# Altium PCB MCU103A.PcbDoc (part 3 of 6)
Units mm, origin at the board's own origin, x right, y up, seen from the top; angles counter-clockwise.
Board outline 58.42 x 139.7 mm, 4 copper layers (Top Signal, GND, PWR, Bottom Signal), stack 1.565 mm thick; 256 components, 210 nets, 1058 pads, 772 vias.
Unrouted connection lines stored in the file: 237.
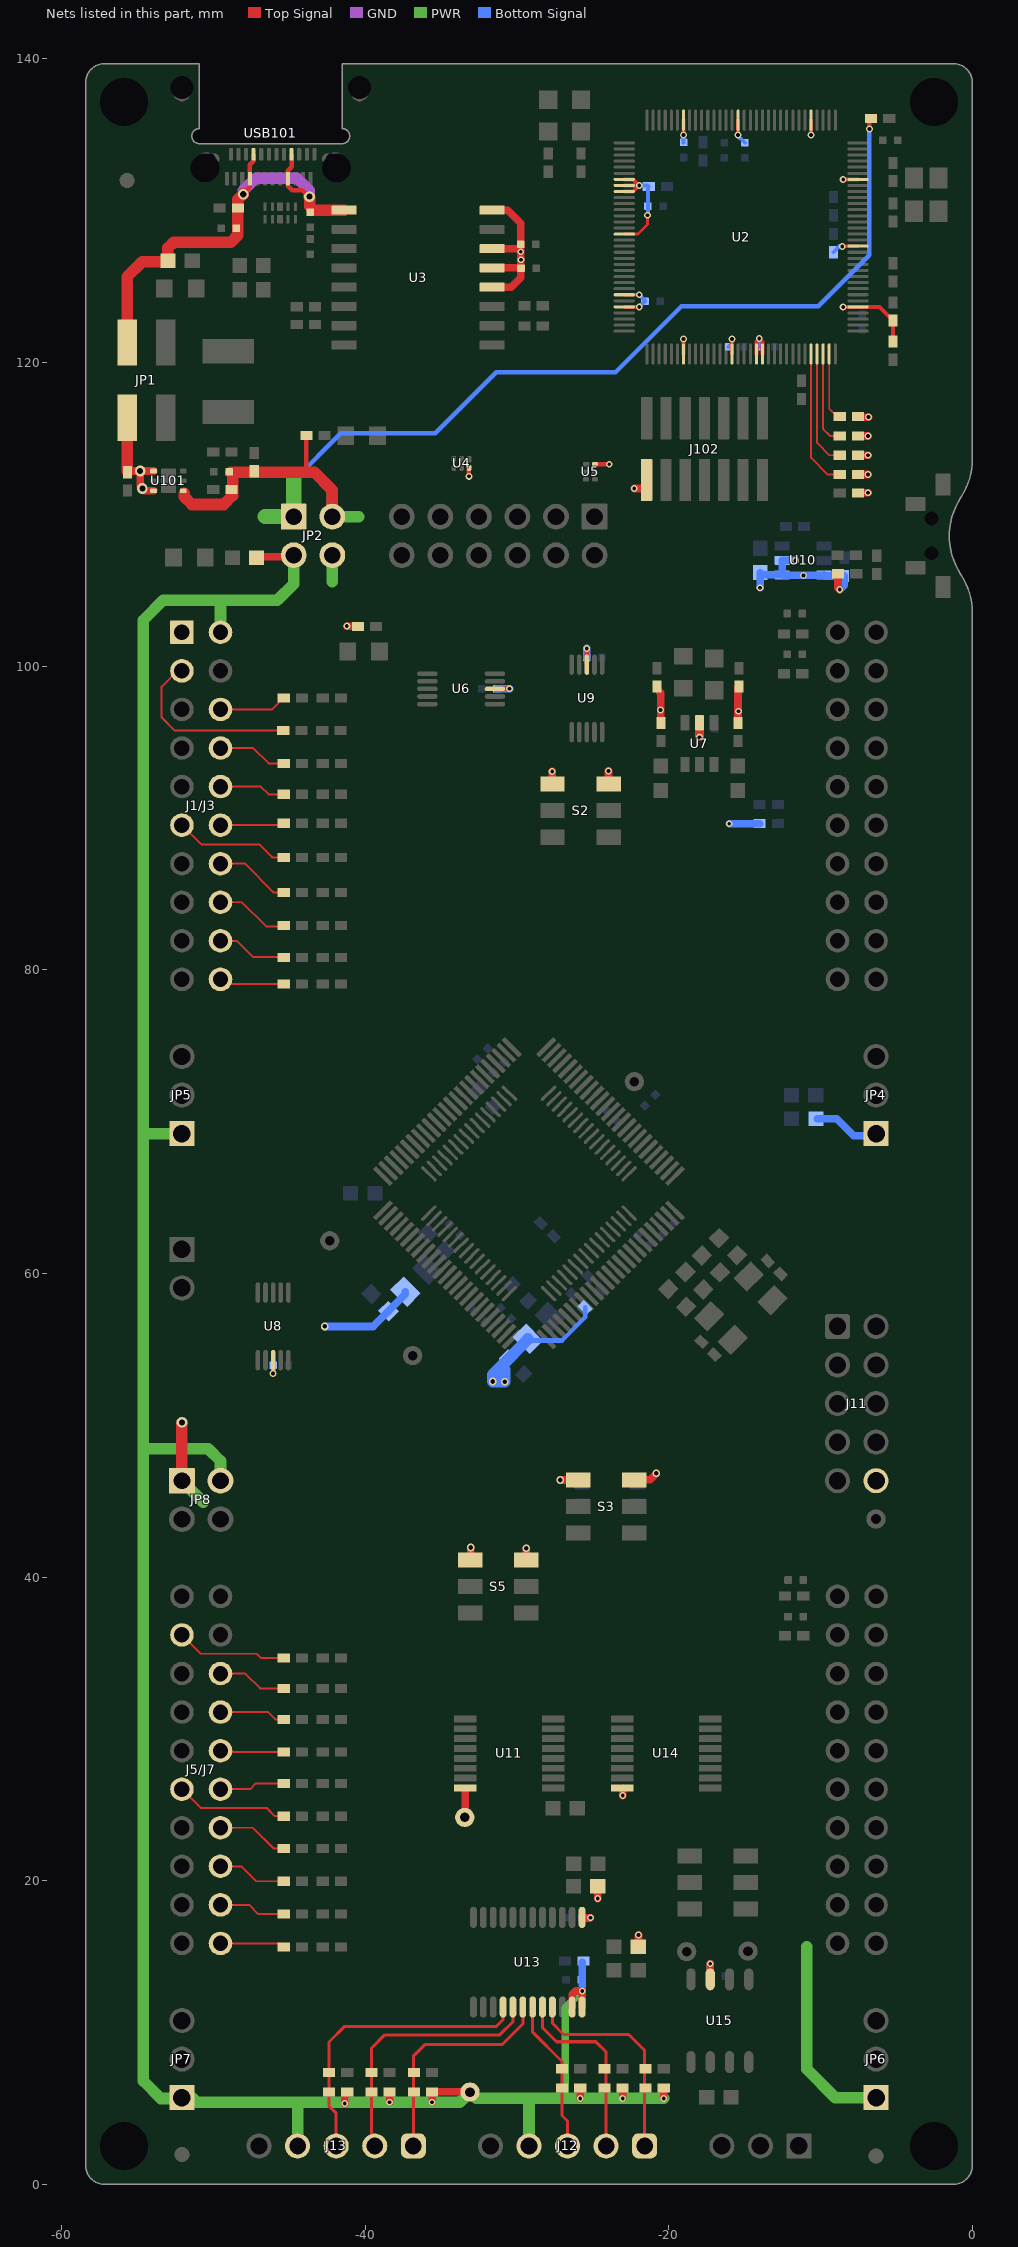
[diagram p4: the nets of this part, all layers, seen from the top]

## Part data (continued)
U7: library part CMP-0051789-2, "Dual Buffer/Driver with Open-Drain Output, DBV0006A, LARGE T&R", F @ Nom Voltage(Max)(Mhz)=150, Generic Part Number=SN74LVC2G07, ICC @ Nom Voltage(Max)(mA)=0.01, Manufacturer="Texas Instruments", Operating Temperature Range(C)="-40 to 125", Rating=Catalog, tpd @ Nom Voltage(Max)(ns)=8.6,4.4,3.7,2.9, Voltage(Nom)(V)=1.8,2.5,3.3,5, 3-State Output=No, AEC Category=Q200, AEC Qualified=N, Bits(#)=2, ComponentLink1Description="Datasheet Link", ComponentLink1URL=http://www.ti.com/lit/ds/symlink/sn74lvc2g07.pdf, ComponentLink2Description="Product Folder", ComponentLink2URL=http://www.ti.com/product/sn74lvc2g07, ComponentLink3Description="Online Datasheet", ComponentLink3URL=http://www.ti.com/product/sn74lvc2g07/datasheet, CompType=IC, DatasheetVersion=SCES308K, Green_EU RoHS=Passed, Green_EU RoHS-2=Passed, Green_Lifecycle=Active, Green_REACh=Passed, Input Type=CMOS/TTL, Logic=True, MountType=SMT, Output Drive (IOL/IOH)(Max)(mA)=32/-32, Output Type=CMOS, PackageDescription=SOT-23-6, PackageReference=DBV0006A, PartNumber=SN74LVC2G07DBVR, RoHS=Y, Schmitt Trigger=No, SizeArea_mm2=8.12, SizeAreaWB_mm2=14.82, SizeX_mm=2.8, SizeY_mm=2.9, SizeZ_mm=1.45, Sub-Family="Inverting Buffer/Driver", Technology Family=LVC, VCC(Max)(V)=5.5, VCC(Min)(V)=1.65
U10: library part CMP-0067340-2, "High-Accuracy, Fixed-Threshold OV/UV Monitor, DDC0006A (SOT-23-T-6)", Alternate Manufacturer="Texas Instruments", Alternate PartNumber=TPS3702CX33DDCT, ComponentLink1Description="Datasheet Link", ComponentLink1URL=http://www.ti.com/lit/ds/symlink/tps3702.pdf, CompType=IC, LatestRevisionDate=2017-06-09, Manufacturer="Texas Instruments", MountType=SMT, PackageDescription=SOT-23-T-6, PackageReference=DDC0006A, PartNumber=TPS3702CX33DDCR, Publisher="Texas Instruments", RoHS=Y, SizeArea_mm2=4.8675, SizeAreaWB_mm2=10.4675, SizeX_mm=1.65, SizeY_mm=2.95, SizeZ_mm=0.87, U/M=EA
U11 U14: library part CMP-0089841-1, "3 Circuit IC Switch 2:1 75Ohm 16-TSSOP", Digikey Part Number=296-3833-1-ND, Manufacturer="Texas Instruments", Max Supply Voltage=5.5V, Min Supply Voltage=2V, Mouser Part Number=595-SN74LV4053APWR, Nominal Supply Current=20uA, On State Resistance=100-225Ω, Operating Temperature Range="-40°C to +85°C", -3Db Bandwith=50MHz, AEC Qualified=No, ComponentLink1Description=Datasheet, ComponentLink1URL=https://upverter.com/datasheet/3a9d815208c4051a64f1f6fd539a8c5a24990e71.pdf, datasheet=https://upverter.com/datasheet/3a9d815208c4051a64f1f6fd539a8c5a24990e71.pdf, Datasheet Path=datasheets/IC-SN74LV4053APWR.pdf, Digikey Description="IC MUX/DEMUX TRIPLE 2X1 16TSSOP", helpURL=https://upverter.com/upn/revision/43c5e7c12a31b2aa/, Lead Free=Yes, Mouser Description="Multiplexer Switch ICs Triple 2-Ch Analog", Mux Demux Ratio=2:1, PackageReference=TSSOP16, Part Number=SN74LV4053APWR, PartNumber=SN74LV4053APWR, PositionCount=3, RoHS=TRUE, SizeZ_mm=1.2mm, Standoff Height=0.05mm, TaMax_C=+85°C, TaMin_C=-40°C
U13: library part CMP-0066458-2, "8-Bit Dual-Supply Bus Transceiver with Configurable Voltage-Level Shifting and Three-State Outputs, PW0024A (TSSOP-24)", Alternate Manufacturer="Texas Instruments", Operating Temperature Range="-40 to 85 C", Rating=Catalog, AEC Category=Q200, AEC Qualified=N, ComponentLink1Description="Datasheet Link", ComponentLink1URL=http://www.ti.com/lit/ds/symlink/sn74lvc8t245.pdf, ComponentLink2Description="Product Folder", ComponentLink2URL=http://www.ti.com/product/sn74lvc8t245, ComponentLink3Description="Online Datasheet", ComponentLink3URL=http://www.ti.com/product/sn74lvc8t245/datasheet, CompType=IC, Manufacturer="Texas Instruments", MountType=SMT, PackageDescription=TSSOP-24, PackageReference=PW0024A, PartNumber=SN74LVC8T245PW, RoHS=Y, SizeArea_mm2=49.92, SizeAreaWB_mm2=82.32, SizeX_mm=6.4, SizeY_mm=7.8, SizeZ_mm=1.2
U15: library part CMP-0080974-2, "3.3-V CAN Transceivers, D0008A (SOIC-8)", Alternate Manufacturer="Texas Instruments", Alternate PartNumber=TCAN332D, AEC Category=Q200, AEC Qualified=N, ComponentLink1Description="Datasheet Link", ComponentLink1URL=http://www.ti.com/lit/ds/symlink/tcan332.pdf, ComponentLink2Description="Product Folder", ComponentLink2URL=http://www.ti.com/product/tcan332, ComponentLink3Description="Online Datasheet", ComponentLink3URL=http://www.ti.com/product/tcan332/datasheet, CompType=IC, Manufacturer="Texas Instruments", MountType=SMT, PackageDescription=SOIC-8, PackageReference=D0008A, PartNumber=TCAN332DR, RoHS=Y, SizeArea_mm2=30.38, SizeAreaWB_mm2=56.58, SizeX_mm=4.9, SizeY_mm=6.2, SizeZ_mm=1.75
U16: library part CMP-0073613-3, "4-Channel Ultra-Low-Capacitance IEC ESD Protection Diode, DQA0010A (USON-10)", Alternate Manufacturer="Texas Instruments", AEC Category=Q200, AEC Qualified=N, ComponentLink1Description="Datasheet Link", ComponentLink1URL=http://www.ti.com/lit/ds/symlink/tpd4e05u06.pdf, ComponentLink2Description="Product Folder", ComponentLink2URL=http://www.ti.com/product/tpd4e05u06, ComponentLink3Description="Online Datasheet", ComponentLink3URL=http://www.ti.com/product/tpd4e05u06/datasheet, CompType=IC, Green_EU RoHS=Passed, Green_EU RoHS-2=Passed, Green_Lifecycle=Active, Green_REACh=Passed, Manufacturer="Texas Instruments", MountType=SMT, PackageDescription=USON-10, PackageReference=DQA0010A, PartNumber=TPD4E05U06DQAR, RoHS=Y, SizeArea_mm2=2.5, SizeAreaWB_mm2=7.0, SizeX_mm=1.0, SizeY_mm=2.5, SizeZ_mm=0.55
U18: library part CMP-0092020-1, Manufacturer="Texas Instruments", Operating Temperature Range=to, Datasheet Path=datasheets/-F2800137SPM.pdf, helpURL=https://upverter.com/upn/revision/9bbda0e19f6e20ca/, PackageReference=LQFP64, PartId=1, Part Number=F2800137SPM, PartNumber=F2800137SPM, RoHS=UNKNOWN, SizeZ_mm=1.6mm, Standoff Height=0.05mm
U101: library part CMP-0066914-5, "1% High-Accuracy, 1-A, Low-Dropout Regulator with Reverse Current Protection, DRV0006A (WSON-6)", Alternate Manufacturer="Texas Instruments", Alternate PartNumber=TPS7A3701DRVT, ComponentLink1Description="Datasheet Link", ComponentLink1URL=http://www.ti.com/lit/ds/symlink/tps7a3701.pdf, CompType=IC, LatestRevisionDate=2017-06-09, Manufacturer="Texas Instruments", MountType=SMT, PackageDescription=WSON-6, PackageReference=DRV0006A, PartNumber=TPS7A3701DRVR, Publisher="Texas Instruments", RoHS=Y, SizeArea_mm2=4, SizeAreaWB_mm2=9, SizeX_mm=2, SizeY_mm=2, SizeZ_mm=0.8, U/M=EA
USB101: library part CMP-0092137-1, "Connector, USB Type-C 24 pin Mid Mount dual row Receptacle Surface Mount", Manufacturer=MUP, Operating Temperature Range="-25°C to +85°C", AEC Qualified=No, ComponentLink1Description=Datasheet, ComponentLink1URL=http://www.mupconnector.com/product/show/id/525.html, Conn Orientation=Horizontal, ContactFinish=Gold,Nickel, datasheet=http://www.mupconnector.com/product/show/id/525.html, Datasheet Path=datasheets/Conn-MUP-U22001.pdf, DUT-Pitch_mm=0.5mm, helpURL=https://upverter.com/upn/revision/6b0c75e83cbd5706/, Is Female=yes, Lead Free=Yes, PackageReference=CONN_USB_8MM94_8MM0, Part Number=MUP-U22001, PartNumber=MUP-U22001, PinCount=24, RoHS=TRUE, Shrouded=true, SizeZ_mm=2.81mm, Usb Standard=OTHER
Y1: library part CMP-0004635-3, "Crystal, 16 MHz, 8pF, SMD", Frequency Stability=+/-30ppm, Frequency_Fixed=16MHz, Manufacturer=NDK, Supplier Part Number 1=644-1157-1-ND, ComponentLink1Description="Datasheet Link", ComponentLink1URL=http://www.ndk.com/images/products/catalog/c_NX3225GA-STD-CRG-1_e.pdf, CompType=Crystal, MountType=SMT, PackageReference=3.2x0.75x2.5mm, PartNumber=NX3225GA-16.000M-STD-CRG-1, RoHS=Y, Supplier 1=Digi-Key, TaMax_C=70°C, TaMin_C=-10°C
Y2: library part CMP-0093370-1, "20 MHz ±10ppm Crystal 8pF 40 Ohms 4-SMD, No Lead", Digikey Part Number=XC1841CT-ND, Frequency Stability=10ppm, Frequency_Fixed=20MHz, Load Capacitance=8pF, Manufacturer="ECS International", Mouser Part Number=520-200-8-30B-CKM, Operating Temperature Range="-20°C to +70°C", AEC Qualified=No, ComponentLink1Description=Datasheet, ComponentLink1URL=https://ecsxtal.com/store/pdf/ecx_53b.pdf, datasheet=https://ecsxtal.com/store/pdf/ecx_53b.pdf, Datasheet Path=datasheets/Crys-ECS-200-8-30B-CKM.pdf, Digikey Description="CRYSTAL 20.0000MHZ 8PF SMD", Esr=40, Frequency Tolerance=10ppm, helpURL=https://upverter.com/upn/revision/b9ae4a09c701963d/, Lead Free=Yes, Mouser Description="Crystals 20.000MHZ 8pF 10ppm -20C +70C", PackageReference=SMD4, Part Number=ECS-200-8-30B-CKM, PartNumber=ECS-200-8-30B-CKM, RoHS=TRUE, Series=ECX-53B, SizeZ_mm=0.85mm, Supplier 1=Digikey, Supplier 2=Mouser, Supplier Part Number 1=XC1841CT-ND, Supplier Part Number 2=520-200-8-30B-CKM, Tolerance_%=10ppm
ZZ1: library part CMP-0077236-1, ClassName=AssemblyNote, CompType=AssemblyNote, Key=AssemblyNote, LatestRevisionDate=2017-08-10, Publisher="Texas Instruments"
ZZ2: library part CMP-0077237-1, ClassName=AssemblyNote, CompType=AssemblyNote, Key=AssemblyNote, LatestRevisionDate=2017-08-10, Publisher="Texas Instruments"
ZZ3: library part CMP-0077238-1, ClassName=AssemblyNote, CompType=AssemblyNote, Key=AssemblyNote, LatestRevisionDate=2017-08-10, Publisher="Texas Instruments"

## Via types
v1: diameter 0.45, hole 0.25, Top Signal to Bottom Signal, tented both sides, 726 vias
v2: diameter 0.5, hole 0.3, Top Signal to Bottom Signal, tented both sides, 22 vias
v3: diameter 0.7, hole 0.4, Top Signal to Bottom Signal, tented both sides, 17 vias
v4: diameter 0.4, hole 0.2, Top Signal to Bottom Signal, tented both sides, 5 vias
v5: diameter 0.5, hole 0.2, Top Signal to Bottom Signal, 2 vias

## Nets (pads, with @x,y where several pads share a name; then routed paths per layer and width w, separated by ;. In a path a pad name is that pad's centre, name@x,y a point inside that pad or via, vN(x,y) a via of type N, cw(c..) or ccw(c..) an arc to the next point about the centre after c; other vN are vias at no path point)
+3V3_MCU: C6.2 C16.1 C18.2 C43.1 C44.2 C45.1 C46.2 C64.1 C74.1 J1/J3.1 J11.10 JP2.4 JP4.1 JP6.1 JP8.1 L2.1 L3.1 R3.2 R4.2 R6.2 R10.2 R11.2 R28.2 R29.2 R30.2 R31.2 R47.2 R48.2 R82.1 S2.1 S2.4 S3.3 S3.6 S5.3 S5.6 TP4.1 U6.8 U7.5 U8.8 U9.8 U10.3 U10.4 U10.5 U11.16 U13.1 U14.16 U15.3 | length 78.6
  Top Signal w0.3: v1(-46.069,53.421) U8.8@-46.069,54.299 ; U6.8@-31.453,98.509 -31.441,98.521 v1(-30.488,98.521) ; U9.8@-25.409,100.225 v1(-25.409,101.178) ; U9.8@-25.397,100.11 -25.397,100.81
  Top Signal w0.5: JP2.4@-42.164,107.315 JP2.4@-42.132,107.283 ; v1(-41.208,102.642) R3.2@-40.623,102.642 ; TP4.1@-33.42,24.76 -33.412,24.768 U11.16@-33.412,25.916 ; S5.6@-33.043,41.177 v2(-33.043,41.957) ; S5.3@-29.387,41.133 v2(-29.387,41.913) ; v1(-27.685,93.069) -27.685,92.265 S2.1@-27.661,92.241 ; v2(-27.163,46.402) S3.6@-26.383,46.402 ; U13.1@-25.691,17.564 v1(-25.165,17.564) ; v1(-24.678,18.835) R47.2@-24.678,19.653 ; v1(-23.971,93.099) -23.971,92.251 S2.4@-23.961,92.241 ; v1(-23.036,25.618) U14.16@-23.036,26.083 ; R48.2@-22.016,15.645 -21.998,15.663 v1(-21.998,16.432) ; S3.3@-21.764,46.492 -21.686,46.414 -21.239,46.414 -20.827,46.826 v2(-20.827,46.841) ; R28.2@-20.808,98.523 -20.522,98.237 R30.2@-20.522,96.27 ; v1(-17.982,95.33) U7.5@-17.982,96.283 ; v1(-17.275,14.543) -17.275,13.515 U15.3@-17.272,13.512 ; R31.2@-15.442,96.27 R29.2@-15.442,98.632 ; R4.2@-8.857,106.094 -8.857,105.169 v1(-8.738,105.05)
  Top Signal w0.762: JP8.1@-52.07,46.355 v3@-52.07,50.15
  PWR w0.762: JP8.1@-52.07,46.355 -50.661,44.946 ; -42.164,105.58 JP2.4@-42.164,107.315 ; -10.903,15.649 -10.903,7.579 -9.039,5.715 JP6.1@-6.35,5.715
  Bottom Signal w0.3: v1(-46.069,53.421) C45.1@-46.067,53.971 C45.1@-46.067,53.971 ; L3.1@-29.289,55.702 -29.178,55.59 -27.037,55.59 -25.517,57.11 R10.2@-25.517,57.765
  Bottom Signal w0.5: v2(-42.655,56.515) -39.472,56.515 C16.1@-38.466,57.52 -37.358,58.628 L2.1@-37.358,58.808 ; C43.1@-31.335,98.521 v1(-30.488,98.521) ; C64.1@-25.699,17.564 v1(-25.165,17.564) ; v1(-25.409,101.178) -25.409,100.58 C46.2@-25.406,100.577 ; v1(-17.982,95.33) C44.2@-17.982,95.865 ; C74.1@-17.275,13.796 v1(-17.275,14.543) ; v1(-16.024,89.632) R11.2@-14.018,89.632 ; v1(-13.99,105.17) R6.2@-13.99,106.17 -13.84,106.02 U10.4@-12.537,106.02 ; v1(-11.662,106.97) U10.5@-12.537,106.97 U10.4@-12.537,106.02 ; R82.1@-10.207,70.203 -8.941,70.203 -7.826,69.088 -6.477,69.088 JP4.1@-6.35,69.215 ; U10.3@-9.822,105.985 v1(-11.139,105.985) -12.502,105.985 U10.4@-12.537,106.02 ; U10.3@-9.787,106.02 -9.711,105.944 C6.2@-8.446,105.944 -8.446,105.342 v1(-8.738,105.05)
  Bottom Signal w0.762: -31.037,53.905 -31.047,53.895 ; L3.1@-29.289,55.702 -29.289,55.653 -31.047,53.895 ; -31.047,53.895 -30.802,53.651 v2(-30.802,52.88) -31.047,52.88 -31.056,52.889 v2(-31.594,52.889) -31.594,53.348 -31.047,53.895
  other v1: -15.414,97.034 -20.552,97.114
  other v3: -52.067,50.2
+3V3_XDS110: C1.2 C2.2 C51.2 C52.2 C53.2 C54.2 C55.2 C56.1 C57.1 C58.2 C102.2 C103.1 J102.1 JP2.3 R57.2 R58.2 R59.2 R60.2 R61.2 R65.2 R70.2 R101.2 R105.2 U2.7 U2.8 U2.9 U2.16 U2.26 U2.28 U2.39 U2.47 U2.51 U2.52 U2.69 U2.79 U2.90 U2.101 U2.113 U2.122 U3.12 U3.13 U3.14 U3.16 U4.6 U5.6 U101.1 | length 66.8
  Top Signal w0.2: U2.16@-22.935,128.47 -22.035,128.47 -21.402,129.103 v1(-21.402,129.709)
  Top Signal w0.254: U2.28@-22.935,123.67 v1(-21.953,123.67) ; U2.26@-22.935,124.47 v1(-21.953,124.47) ; U2.9@-22.935,131.27 -22.353,131.27 v1(-21.953,131.67) ; U2.8@-22.935,131.67 v1(-21.953,131.67) ; U2.7@-22.935,132.07 -22.353,132.07 v1(-21.953,131.67) ; U2.39@-19.035,120.57 v1(-19.035,121.552) ; v1(-19.035,134.988) U2.122@-19.035,135.97 ; U2.47@-15.835,120.57 v1(-15.835,121.552) ; v1(-15.435,134.988) U2.113@-15.435,135.97 ; U2.51@-14.235,120.57 -14.235,121.387 v1(-14.041,121.581) -13.835,121.375 U2.52@-13.835,120.57 ; v1(-10.635,134.988) U2.101@-10.635,135.97 ; v1@-8.552,127.663 U2.79@-7.529,127.663 ; v1(-8.517,123.67) U2.69@-7.535,123.67 -6.132,123.67 R65.2@-5.232,122.77 ; v1(-8.517,132.07) U2.90@-7.535,132.07 ; R70.2@-5.241,121.392 -5.241,122.761 R65.2@-5.232,122.77 ; R65.2@-5.164,122.838 R65.2@-5.232,122.77
  Top Signal w0.3: -43.872,112.909 R105.2@-43.872,115.189 ; v1(-33.165,112.509) -33.165,113.053 U4.6@-33.153,113.065 ; U5.6@-24.869,113.306 v1(-23.927,113.306)
  Top Signal w0.5: U3.12@-31.639,124.968 -30.366,124.968 -29.754,125.58 C2.2@-29.754,126.238 ; U3.13@-31.639,126.238 C2.2@-29.754,126.238 ; U3.14@-31.639,127.508 v1@-29.839,127.508 ; U3.16@-31.639,130.048 -30.614,130.048 -29.754,129.188 -29.754,127.529 -29.754,126.914 C2.2@-29.754,126.238 ; C2.2@-29.735,126.222 -29.751,126.238 C2.2@-29.754,126.238 ; v1(-22.273,111.706) -21.639,111.706 -21.458,111.888 J102.1@-21.458,112.265
  Top Signal w0.508: R57.2@-7.546,111.428 R57.2@-7.542,111.424 v1(-6.877,111.424) ; R61.2@-7.546,112.628 v1(-6.881,112.628) ; R60.2@-7.546,113.898 v1(-6.881,113.898) ; R59.2@-7.546,115.168 v1(-6.881,115.168) ; R58.2@-7.517,116.409 v1(-6.852,116.409)
  Top Signal w0.762: -51.926,111.401 -51.926,111.173 -51.408,110.655 -49.324,110.655 -48.737,111.242 C102.2@-48.737,112.778 ; C102.2@-48.843,112.792 -43.357,112.792 -42.164,111.599 JP2.3@-42.164,109.855
  PWR w0.762: JP2.3@-42.164,109.494 JP2.3@-42.164,109.855 ; -42.164,111.432 JP2.3@-42.164,109.855 ; -40.434,109.855 JP2.3@-42.164,109.855
  Bottom Signal w0.254: v1(-21.953,123.67) -21.592,124.031 C55.2@-21.571,124.031 -21.571,124.088 v1(-21.953,124.47) ; v1(-21.953,131.67) -21.389,131.67 C57.1@-21.327,131.608 -21.369,131.566 -21.369,130.558 -21.369,129.694 -21.384,129.709 v1(-21.402,129.709) ; v1(-19.035,134.988) -19.035,134.513 C52.2@-19.03,134.508 ; C54.2@-16.061,121.038 -15.835,121.264 v1(-15.835,121.552) ; v1(-15.435,134.988) -15.435,134.934 C51.2@-14.986,134.485 ; C56.1@-9.164,127.267 -8.761,127.67 -8.738,127.647 v1(-8.581,127.647)
  Bottom Signal w0.3: C53.2@-14.082,121.038 -14.041,121.079 v1(-14.041,121.581)
  other v1: -29.743,126.771 -29.751,127.305
+5V0_MCU: C65.2 C67.1 J1/J3.21 J12.4 J13.4 JP2.2 JP5.1 JP7.1 JP8.2 R43.2 R72.2 R73.2 R74.2 R75.2 R76.2 R77.2 TP5.1 U13.23 U13.24 | length 183.4
  Top Signal w0.305: U13.24@-25.718,11.688 U13.24@-25.707,11.699
  Top Signal w0.5: R43.2@-47.149,107.207 -44.812,107.207 JP2.2@-44.704,107.315 ; v1(-41.343,5.336) R77.2@-41.343,6.015 ; v1(-38.389,5.417) R76.2@-38.389,6.096 ; v1(-35.595,5.417) R75.2@-35.595,6.096 -33.106,6.096 TP5.1@-33.096,6.086 ; U13.23@-26.365,11.688 -26.365,12.525 -26.142,12.748 v1(-25.707,12.748) U13.24@-25.707,11.699 ; R74.2@-25.835,6.35 -25.829,6.344 v1(-25.829,5.665) ; v1(-23.041,5.671) R73.2@-23.041,6.35 ; v1(-20.33,5.671) R72.2@-20.33,6.35
  PWR w0.5: -26.815,5.671 -26.815,11.64 v1(-25.707,12.748)
  PWR w0.762: JP7.1@-52.07,5.715 -51.38,5.715 -51.082,5.417 -44.528,5.417 ; JP5.1@-52.07,69.215 -54.384,69.215 -54.606,69.437 ; JP7.1@-51.785,5.665 -53.457,5.665 -54.606,6.814 -54.606,48.45 ; JP8.2@-49.53,46.355 -49.53,47.652 -50.328,48.45 -54.606,48.45 ; J1/J3.21@-49.53,102.235 -49.53,104.308 -49.501,104.337 ; JP2.2@-44.704,107.315 -44.704,105.418 -45.785,104.337 -49.501,104.337 ; J13.4@-44.45,2.54 -44.45,5.339 -44.528,5.417 ; J12.4@-29.21,2.54 -29.21,5.606 -29.275,5.671 ; v1(-20.33,5.671) v1(-23.041,5.671) -26.815,5.671 -29.275,5.671 ; -54.606,48.45 -54.606,48.855 -54.606,69.437 ; -54.606,69.437 -54.606,103.044 -53.313,104.337 -49.501,104.337 ; -44.528,5.417 v1(-38.389,5.417) v1(-35.595,5.417) -33.765,5.417 TP5.1@-33.096,6.086 -32.681,5.671 -29.275,5.671
  Bottom Signal w0.305: C67.1@-25.707,14.632 C67.1@-25.628,14.711
  Bottom Signal w0.5: v1(-25.707,12.748) C67.1@-25.707,14.632
+5V0_USB: C101.2 C105.2 JP1.1 R7.2 R100.2 U3.1 USB101.A4 USB101.A9 USB101.B4 USB101.B9 | length 31.6
  Top Signal w0.3: v3@-48.02,131.121 -47.595,131.546 USB101.A9@-47.595,132.12 -47.595,133.04 -47.345,133.29 USB101.B4@-47.345,133.72 ; USB101.B9@-44.845,133.72 -44.845,132.889 -45.095,132.639 USB101.A4@-45.095,132.12 -45.095,131.64 -44.797,131.342 -44.132,131.342 v3@-43.626,130.836 ; C105.2@-43.491,130.048 C105.2@-43.448,130.09
  Top Signal w0.762: JP1.1@-55.676,121.322 -55.676,125.669 -54.692,126.653 R7.2@-53.073,126.653 ; R7.2@-52.992,126.704 -52.992,127.552 -52.614,127.93 -48.842,127.93 -48.387,128.385 R100.2@-48.387,130.175 -48.387,130.745 v3@-48.025,131.107 ; v3@-43.663,130.87 -43.663,130.305 C105.2@-43.448,130.09 ; C105.2@-43.491,130.048 U3.1@-41.389,130.048
  GND w0.762: v3(-48.029,131.089) -48.029,131.333 -47.205,132.157 -44.491,132.157 -43.671,131.337 v3(-43.671,130.929)
+5V0_XDS110: C100.1 JP1.2 JP2.1 R62.1 U101.4 U101.6 | length 67.2
  Top Signal w0.3: v1(-6.79,135.38) -6.79,135.979 R62.1@-6.678,136.091
  Top Signal w0.5: C100.1@-55.658,112.776 -55.574,112.86 v3(-54.824,112.86) ; U101.6@-53.934,111.56 -54.531,111.56 -54.824,111.853 v3(-54.824,112.86) ; U101.4@-53.934,112.86 v3(-54.824,112.86)
  Top Signal w0.762: C100.1@-55.676,112.832 JP1.2@-55.676,116.372
  PWR w1: -46.595,109.855 JP2.1@-44.704,109.855 -44.704,112.324
  Bottom Signal w0.3: JP2.1@-44.675,110.109 -44.675,112.271 -41.602,115.344 -35.391,115.344 -31.371,119.364 -23.511,119.364 -19.165,123.71 -10.15,123.71 -6.79,127.07 v1(-6.79,135.38) ; JP2.1@-44.461,110.245 JP2.1@-44.166,110.245
  other v3: -54.677,111.706
ADCINA0/B15/C15: J5/J7.70 R12.1 | length 4.3
  Top Signal w0.127: J5/J7.70@-49.53,15.875 -45.591,15.875 R12.1@-45.365,15.649
ADCINA1/B7: J1/J3.30 R13.1 | length 4.3
  Top Signal w0.127: J1/J3.30@-49.53,79.375 -49.216,79.061 R13.1@-45.365,79.061
ADCINA2/B6/C9: J1/J3.24 R14.1 | length 4.6
  Top Signal w0.127: J1/J3.24@-49.53,94.615 -47.371,94.615 -46.355,93.599 R14.1@-45.365,93.599
ADCINA3/B9/C7: J1/J3.25 R15.1 | length 4.4
  Top Signal w0.127: J1/J3.25@-49.53,92.075 -46.863,92.075 -46.355,91.567 R15.1@-45.365,91.567
ADCINA4/B8: J5/J7.66 R16.1 | length 4.3
  Top Signal w0.127: J5/J7.66@-49.53,26.035 -47.586,26.035 -47.205,26.416 R16.1@-45.365,26.416
ADCINA5: J5/J7.65 R17.1 | length 4.2
  Top Signal w0.127: J5/J7.65@-49.53,28.575 -49.434,28.479 R17.1@-45.365,28.479
ADCINA6: J1/J3.23 R18.1 | length 4.5
  Top Signal w0.127: J1/J3.23@-49.53,97.155 -46.127,97.155 R18.1@-45.365,97.917
ADCINA7/C3: J1/J3.29 R19.1 | length 4.6
  Top Signal w0.127: J1/J3.29@-49.53,81.915 -48.453,81.915 -47.4,80.862 R19.1@-45.365,80.862
ADCINA9: J5/J7.46 R20.1 | length 7.4
  Top Signal w0.127: J5/J7.46@-52.07,26.035 -50.845,24.81 -46.5,24.81 -45.947,24.257 R20.1@-45.365,24.257
ADCINA10/B1/C10: J5/J7.64 R21.1 | length 4.4
  Top Signal w0.127: J5/J7.64@-49.53,31.115 -46.394,31.115 -45.917,30.638 R21.1@-45.365,30.638
ADCINA11/B10/C0: J1/J3.27 R22.1 | length 5
  Top Signal w0.127: J1/J3.27@-49.53,86.995 -47.914,86.995 -46.009,85.09 R22.1@-45.365,85.09
ADCINA12/C5: J5/J7.69 R23.1 | length 4.4
  Top Signal w0.127: J5/J7.69@-49.53,18.415 -47.635,18.415 -47.031,17.811 R23.1@-45.365,17.811
ADCINA14/B14/C4: J1/J3.26 R24.1 | length 4.2
  Top Signal w0.127: J1/J3.26@-49.53,89.535 -45.492,89.535 R24.1@-45.365,89.662
ADCINB2/C6: J1/J3.2 R25.1 | length 12
  Top Signal w0.127: J1/J3.2@-52.278,99.796 -53.413,98.661 -53.413,96.625 -52.546,95.758 R25.1@-45.398,95.758
ADCINB3: J1/J3.6 R26.1 | length 7.6
  Top Signal w0.127: J1/J3.6@-52.07,89.535 -50.8,88.265 -46.99,88.265 -46.136,87.411 R26.1@-45.365,87.411
ADCINB4/C8: J5/J7.67 R27.1 | length 4.7
  Top Signal w0.127: J5/J7.67@-49.53,23.495 -47.39,23.495 -46.024,22.129 R27.1@-45.365,22.129
ADCINB5: J5/J7.68 R84.1 | length 4.6
  Top Signal w0.127: J5/J7.68@-49.53,20.955 -48.162,20.955 -47.177,19.97 R84.1@-45.365,19.97
ADCINB11: J5/J7.63 R85.1 | length 4.6
  Top Signal w0.127: J5/J7.63@-49.53,33.655 -47.91,33.655 -46.925,32.67 R85.1@-45.365,32.67
ADCINB12/C2: J1/J3.28 R86.1 | length 5
  Top Signal w0.127: J1/J3.28@-49.53,84.455 -48.115,84.455 -46.528,82.868 R86.1@-45.151,82.868
ADCINC1: J5/J7.42 R87.1 | length 7.3
  Top Signal w0.127: J5/J7.42@-52.07,36.195 -50.831,34.956 -47.129,34.956 -46.844,34.671 R87.1@-45.365,34.671
DEBUG_ID4: R58.1 U2.63 | length 4.5
  Top Signal w0.127: U2.63@-9.435,120.57 -9.435,116.952 -8.921,116.438 R58.1@-8.746,116.438
DEBUG_ID5: R59.1 U2.62 | length 6.2
  Top Signal w0.127: U2.62@-9.835,120.57 -9.835,115.619 -9.384,115.168 R59.1@-8.746,115.168
DEBUG_ID6: R60.1 U2.61 | length 7.7
  Top Signal w0.127: U2.61@-10.235,120.57 -10.235,114.711 -9.422,113.898 R60.1@-8.746,113.898
DEBUG_ID7: R61.1 U2.60 | length 9.2
  Top Signal w0.127: U2.60@-10.635,120.57 -10.635,113.723 -9.54,112.628 R61.1@-8.746,112.628
EQEP1A: C68.1 J12.1 R72.1 U13.21 | length 14.2
  Top Signal w0.2: U13.21@-27.668,11.688 -27.668,10.612 -26.935,9.879 -22.645,9.879 -21.59,8.824 J12.1@-21.59,2.54
EQEP1B: C69.1 J12.2 R73.1 U13.20 | length 12.4
  Top Signal w0.2: U13.20@-28.318,11.688 -28.318,10.321 -27.398,9.401 -24.806,9.401 -24.13,8.725 J12.2@-24.13,2.54
EQEP1I: C70.1 J12.3 R74.1 U13.19 | length 10.1
  Top Signal w0.2: U13.19@-28.968,11.688 -28.968,10.03 -27.034,8.096 -27.034,4.548 -26.67,4.184 J12.3@-26.67,2.54
EQEP2A: C71.1 J13.1 R75.1 U13.18 | length 15.1
  Top Signal w0.2: J13.1@-36.83,2.54 -36.83,8.45 -36.073,9.207 -30.983,9.207 -29.618,10.572 U13.18@-29.618,11.688
EQEP2B: C72.1 J13.2 R76.1 U13.17 | length 17.7
  Top Signal w0.2: J13.2@-39.132,2.453 -39.575,2.896 -39.575,8.985 -38.707,9.853 -31.134,9.853 -30.268,10.719 U13.17@-30.268,11.688
EQEP2I: C73.1 J13.3 R77.1 U13.16 | length 19.9
  Top Signal w0.2: J13.3@-41.91,2.54 -41.91,4.687 -42.377,5.154 -42.377,9.383 -41.347,10.413 -31.351,10.413 -30.918,10.846 U13.16@-30.918,11.688